# Altium PCB CL10C200JB8NNNC.pcbdoc
Units mil, origin at the board's own origin, x right, y up, seen from the top; angles counter-clockwise.
Board outline 609.4 x 555.9 mil, 2 copper layers (Top Layer, Bottom Layer), stack 0 mil thick; 1 components, 0 nets, 2 pads, 0 vias.
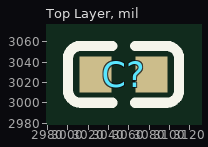
[diagram p0: Top Layer view]
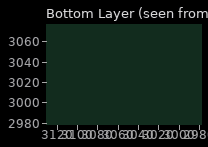
[diagram p1: Bottom Layer view, seen from below]

## Layer stack, top to bottom
Top Layer: signal copper (thickness not stored)
Bottom Layer: signal copper (thickness not stored)

## Board outline
3359.4,2750 2750,2750 2750,3305.9 3359.4,3305.9

## Components (designator, comment, footprint, x,y, rotation, side; value= is the part's Value field where it differs from the comment)
C? "20pF" C0603 3054.7,3028 r0 top

## Footprints (in the part's own frame and the unit in brackets; to place one, negate y for a bottom-side part, rotate by r counter-clockwise, add the part's x,y. Pads: shape width x height; smd on the part's side, far side on the other; paste and mask are expansions set on the pad)
C0603 [mil]
  rect 31.5x35.4 smd: 1(-27.5,0) 2(27.6,0)
  silkscreen extent -55,-28 55,28

## Nets (pads, with @x,y where several pads share a name; then routed paths per layer and width w, separated by ;. In a path a pad name is that pad's centre, name@x,y a point inside that pad or via, vN(x,y) a via of type N, cw(c..) or ccw(c..) an arc to the next point about the centre after c; other vN are vias at no path point)
pads on no net: C?.1 C?.2